# Altium PCB EzRing.PcbDoc
Units mm, origin at the board's own origin, x right, y up, seen from the top; angles counter-clockwise.
Board outline 50.25 x 50.25 mm, 2 copper layers (Top Layer, Bottom Layer); 36 components, 31 nets, 150 pads, 0 vias.
Unrouted connection lines stored in the file: 66.
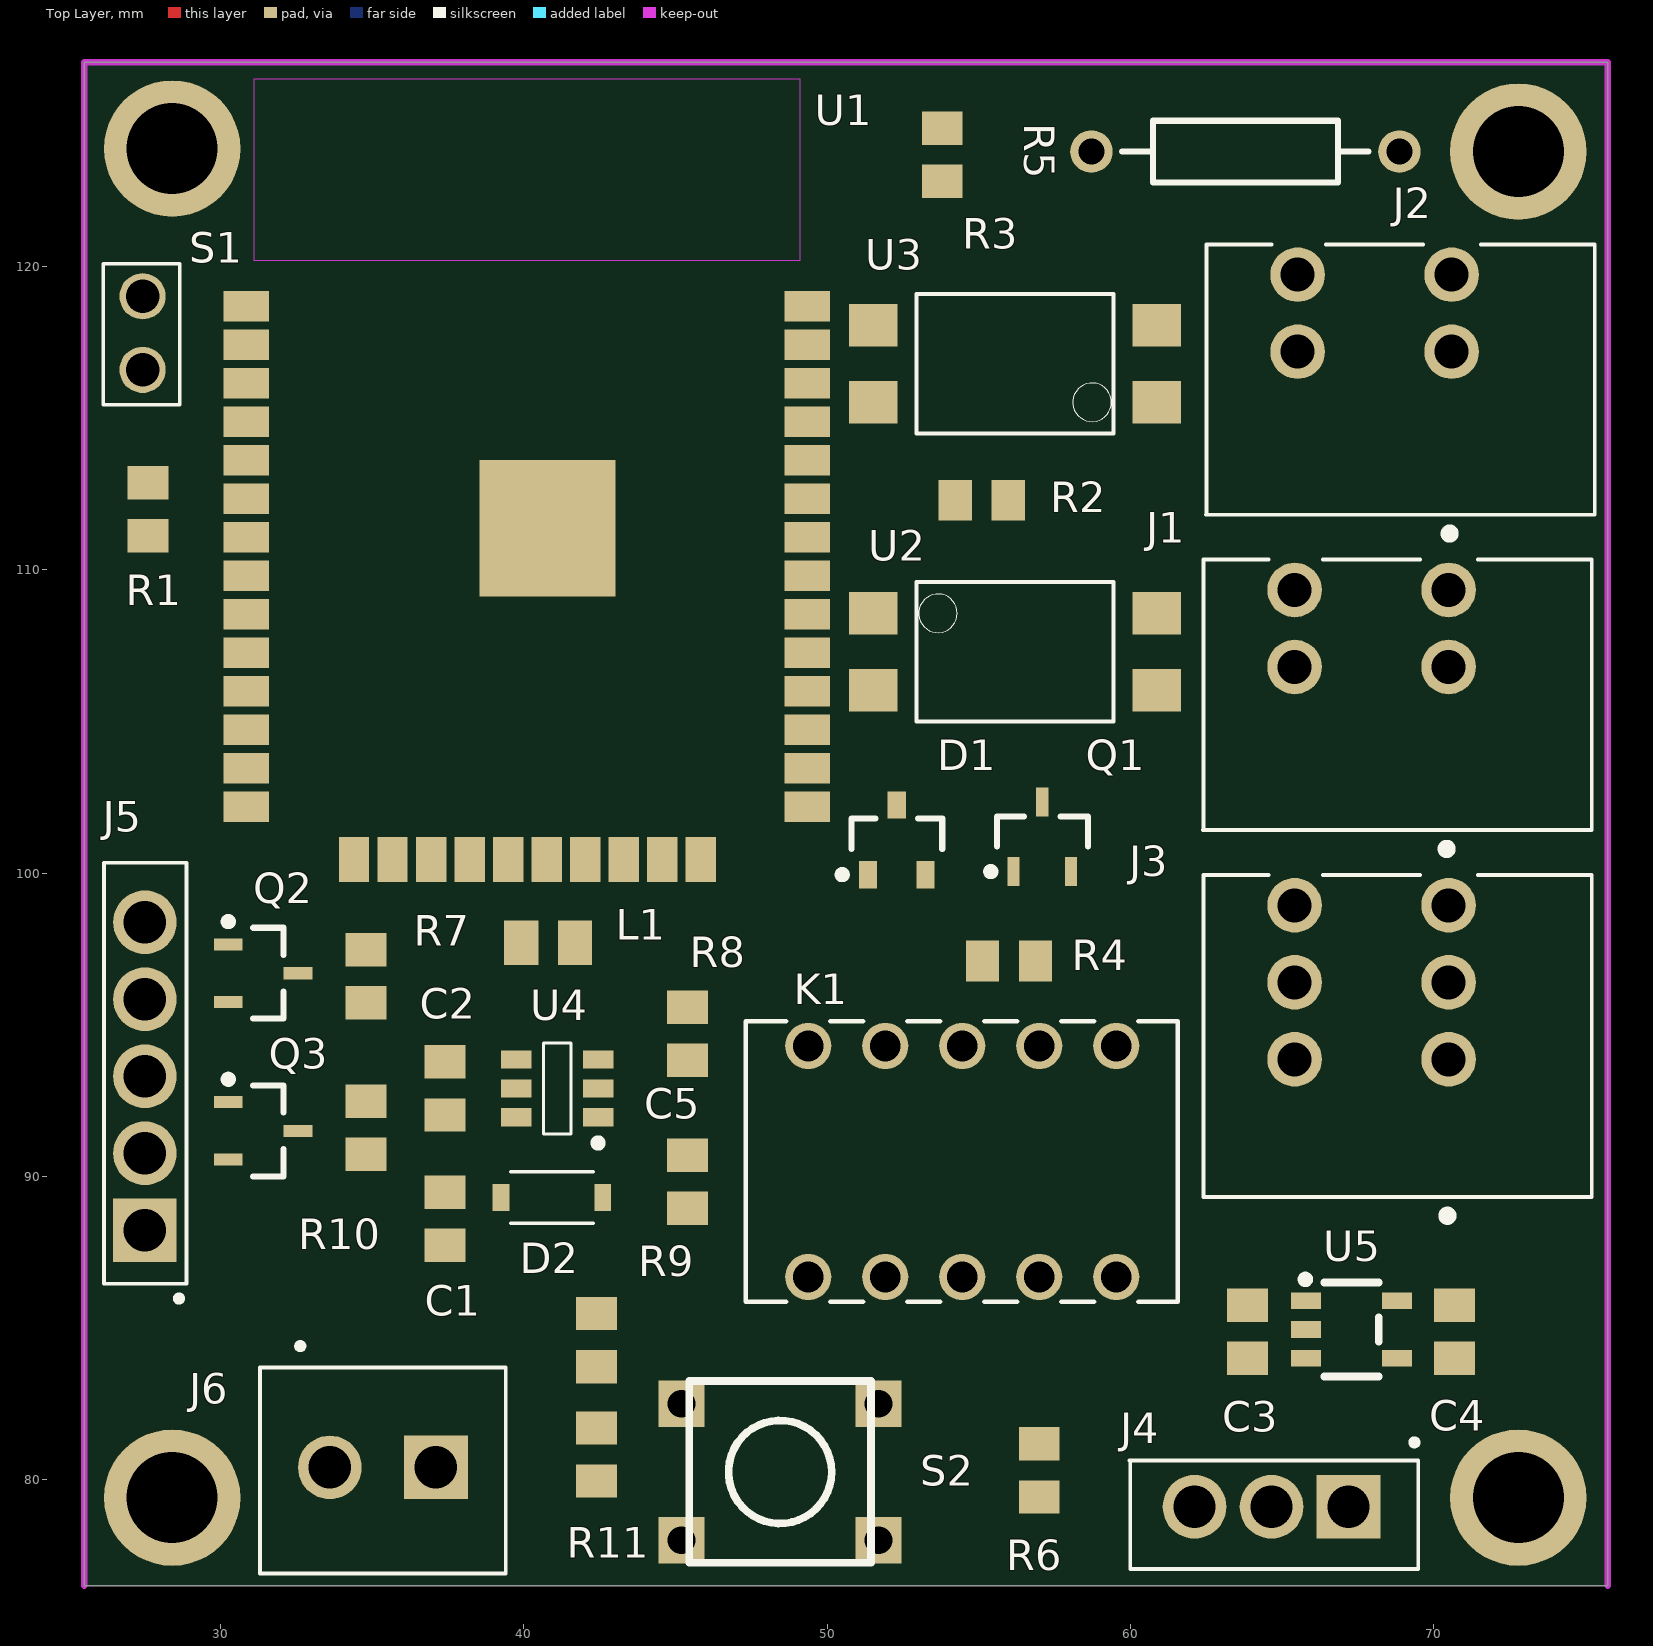
[diagram p0: Top Layer view]
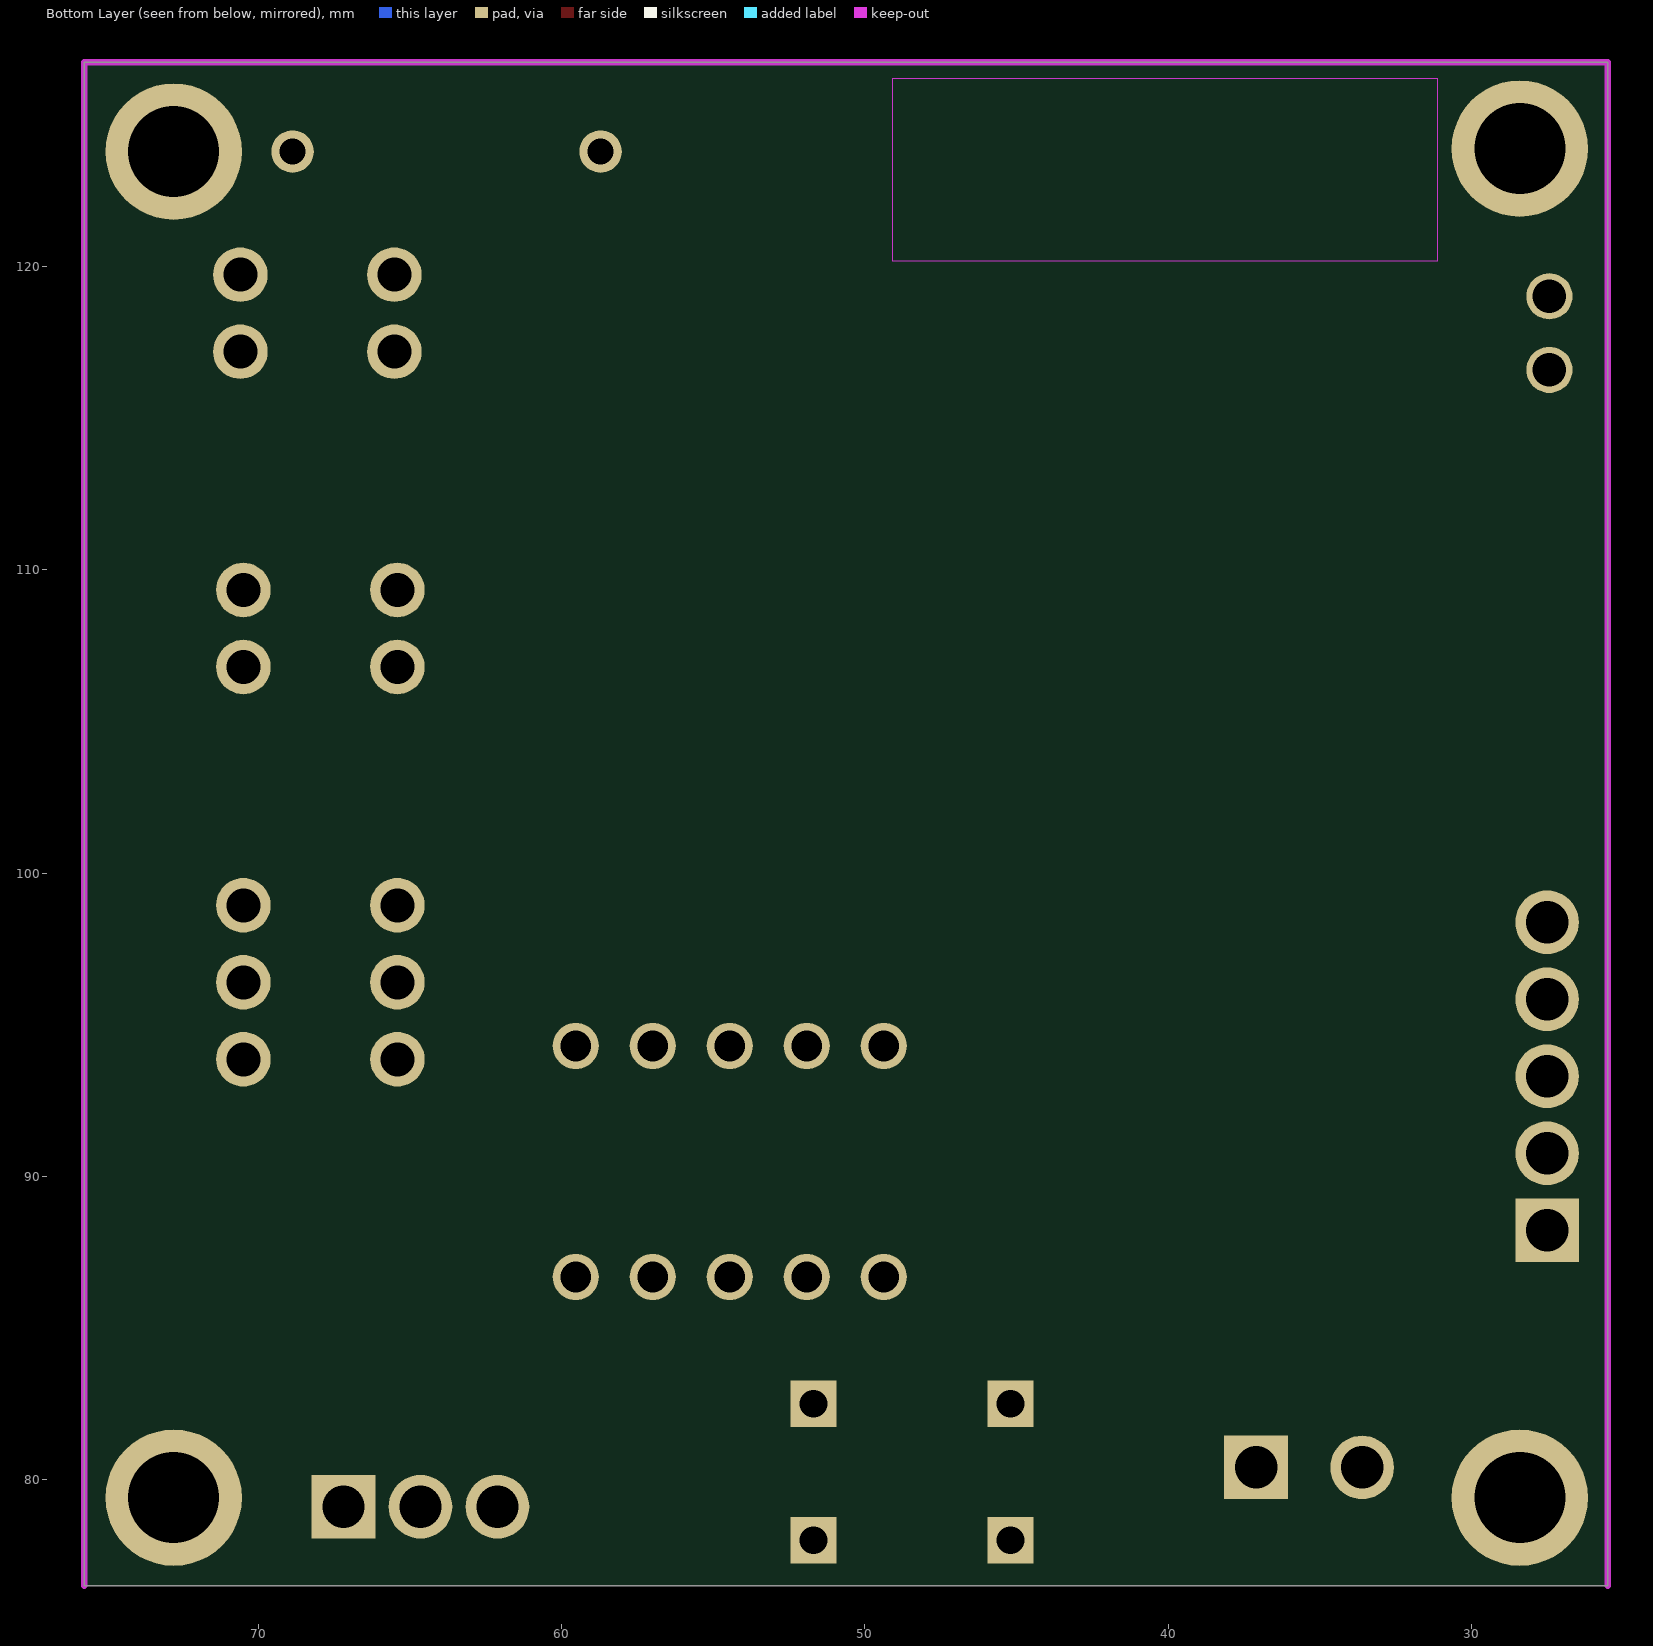
[diagram p1: Bottom Layer view, seen from below]

## Layer stack, top to bottom
Top Solder: solder mask 0.0102, Solder Resist, Dk 3.5
Top Layer: signal copper 0.0356
Dielectric 1: dielectric 0.32, FR-4, Dk 4.8
Bottom Layer: signal copper 0.0356
Bottom Solder: solder mask 0.0102, Solder Resist, Dk 3.5

## Board outline
25.5,76.496 75.75,76.496 75.75,126.746 75.438,126.746 25.5,126.746
cut-out: 25.8,126.7
cut-out: 129.794,126.746

## Design rules (kind name [scope] priority, off if disabled: settings)
Clearance [All] p1: gap=0.254 ignorepadtopadclearanceinfootprint=FALSE except(0: Arc-Hole Track-Hole SMDPad-Hole THPad-Hole Via-Hole Fill-Hole Poly-Hole Region-Hole Text-Hole)
PolygonConnect [All] p1: connectstyle=Relief reliefconductorwidth=0.254 reliefentries=4 polygonreliefangle="90 Angle" airgapwidth=0.254
RoutingVias [All] p1: holewidth=0.711 width=1.27 viastyle="Through Hole" minholewidth=0.711 minwidth=1.27 maxholewidth=0.711 maxwidth=1.27
SolderMaskExpansion [All] p1: expansion=0.102 istentingtop=FALSE
Width [All] p1: maxlimit=0.254 minlimit=0.254 preferedwidth=0.254
30 further rules are at their usual default settings.

## Components (designator, comment, footprint, x,y, rotation, side; value= is the part's Value field where it differs from the comment)
C1 "10nF" 0805 37.4,88.6 r90 top
C2 "10uF" 0805 37.4,92.9 r270 top
C3 "0.1uF" 0805 63.872,84.872 r90 top
C4 "0.1uF" 0805 70.7,84.872 r90 top
C5 "22uF" 0805 45.4,89.825 r90 top
D1 "BAT54C" "BAT54 series" 52.3,101.1 r90 top
D2 "SS1030_R1_00001" "SOD123 DIODE" 40.9,89.4 r0 top
J1 "DG141V-2.54-02P" "term blk 2p 2.54 2 leg 5.08 between legs" 65.42,104.26 r90 top
J2 "DG141V-2.54-02P" "term blk 2p 2.54 2 leg 5.08 between legs" 65.52,114.66 r90 top
J3 "DG250-3.5-03P" "term blk 2.54 3p 2 leg 5.08  between leg" 65.42,93.86 r90 top
J4 "2.54 mm" HEADER-2.54-03 67.2,79.1 r180 top
J5 "2.54 mm" HEADER-2.54-5P 27.5,88.22 r90 top
J6 "DG350-3.5-02P" Header-3.5-02 37.1,80.4 r180 top
K1 "TQ2-5V" RELAY_TQ2_2C_PAN 49.38,86.68 r90 top
L1 "4.7uH" INDC2012X10N 40.8,97.7 r0 top
Q1 "BC818" BC818 57.1,101.2 r90 top
Q2 "BC818" BC818 31.4,96.7 r0 top
Q3 "BC818" BC818 31.4,91.5 r0 top
R1 "12K" 0805 27.6,112 r270 top
R2 "680" 0805 55.1,112.3 r0 top
R3 "12K" 0805 53.8,123.7 r270 top
R4 "12K" 0805 56,97.1 r180 top
R5 "680" AXIAL-0.4 63.8,123.8 r180 top
R6 "12K" 0805 57,80.3 r90 top
R7 "12K" 0805 34.8,96.6 r270 top
R8 "100K" 0805 45.4,94.7 r270 top
R9 "12K" 0805 42.4,84.6 r270 top
R10 "12K" 0805 34.8,91.6 r90 top
R11 "2.87K" 0805 42.4,80.825 r90 top
S1 "Reset" "Kısa Devre anahtarlaması" 27.425,119.025 r0 top
S2 "Button" "Push Button" 51.7,78 r90 top
U1 "ESP32-S" ESP-32S 40.1,111.7 r0 top
U2 "LTV-816S-TP-C" "OPTO LTV-816S" 56.2,107.3 r270 top
U3 "LTV-816S-TP-C" "OPTO LTV-816S" 56.2,116.8 r90 top
U4 "MP2359" "MP2359 vol reg TSOT23-6" 41.1,92.9 r180 top
U5 "LR9102G-3V3" LR9102G-3V3-AE5-R -93.855,-220.471 r270 top

## Footprints (in the part's own frame and the unit in brackets; to place one, negate y for a bottom-side part, rotate by r counter-clockwise, add the part's x,y. Pads: shape width x height; smd on the part's side, far side on the other; paste and mask are expansions set on the pad)
0805 [mm] "Chip Resistor, 2-Leads, Body 2,00x1,23mm, IPC Medium Density"
  rect 1.1x1.35 smd: 1(-0.875,0) 2(0.875,0)
  body extent -1.07,-0.67 1.08,0.67, height 0.65
AXIAL-0.4 [mm] "Axial Device, Thru-Hole; 2 Leads; 0.4 in Pin Spacing"
  round 1.4 hole 0.85: 1(-5.08,0) 2(5.08,0)
  silkscreen extent -4.06,-1.02 4.06,1.02
"BAT54 series" [mm] "Schottky barrier diodes SOT23, 3-Leads,"
  rect 0.9x0.6 smd: 1(-1.15,0.95) 2(-1.15,-0.95) 3(1.15,0)
  silkscreen extent -1.27,-1.5 0.7,1.92, body extent -0.7,-1.5 0.7,1.5, height 1.1
BC818 [mm] "SOT23127P600-8N"
  rect 0.95x0.4 smd: 1(-1.15,0.95) 2(-1.15,-0.95) 3(1.15,0)
  silkscreen extent -1.27,-1.5 0.67,1.82, body extent -0.67,-1.47 0.67,1.48, height 1.1
ESP-32S [mm]
  rect 1.5x1 smd: 1(-9.25,7) 2(-9.25,5.73) 3(-9.25,4.46) 4(-9.25,3.19) 5(-9.25,1.92) 6(-9.25,0.65) 7(-9.25,-0.62) 8(-9.25,-1.89) 9(-9.25,-3.16) 10(-9.25,-4.43) 11(-9.25,-5.7) 12(-9.25,-6.97) 13(-9.25,-8.24) 14(-9.25,-9.51) 25(9.25,-9.51) 26(9.25,-8.24) 27(9.25,-6.97) 28(9.25,-5.7) 29(9.25,-4.43) 30(9.25,-3.16) 31(9.25,-1.89) 32(9.25,-0.62) 33(9.25,0.65) 34(9.25,1.92) 35(9.25,3.19) 36(9.25,4.46) 37(9.25,5.73) 38(9.25,7)
  rect 1x1.5 smd: 15(-5.7,-11.25) 16(-4.43,-11.25) 17(-3.16,-11.25) 18(-1.89,-11.25) 19(-0.62,-11.25) 20(0.65,-11.25) 21(1.92,-11.25) 22(3.19,-11.25) 23(4.46,-11.25) 24(5.73,-11.25)
  rect 4.5x4.5 smd: GND(0.68,-0.33)
  Keep-Out Layer region: 9,8.5 -9,8.5 -9,14.5 9,14.5
  Keep-Out Layer region: 9,8.5 -9,8.5 -9,14.5 9,14.5
HEADER-2.54-03 [mm]
  rect 2.1x2.1 hole 1.4: 1(0,0)
  round 2.1 hole 1.4: 2(2.54,0) 3(5.08,0)
  silkscreen extent -2.3,-2.22 7.22,2.05
HEADER-2.54-5P [mm] "klemens"
  rect 2.1x2.1 hole 1.4: 1(0,0)
  round 2.1 hole 1.4: 2(2.54,0) 3(5.08,0) 4(7.62,0) 5(10.16,0)
  silkscreen extent -2.35,-1.38 12.13,1.35
Header-3.5-02 [mm] "klemens"
  rect 2.1x2.1 hole 1.4: 1(0,0)
  round 2.1 hole 1.4: 2(3.5,0)
  silkscreen extent -2.3,-4.1 5.8,3.5
INDC2012X10N [mm] "Chip Inductor, 2-Leads, Body 2,00x1,25mm, IPC Medium Density"
  rect 1.13x1.47 smd: 1(-0.885,0) 2(0.885,0)
  body extent -1.1,-0.72 1.1,0.72, height 1
"Kısa Devre anahtarlaması" [mil]
  round 60 hole 43.31: 1(0,0) 2(0,-95.47)
  silkscreen extent -51,-141 48,42
LR9102G-3V3-AE5-R [mm] "LR9102G-3V3-AE5-R - IC-LR9102 V.REG 3V3 SOT-23-5 TR UTC"
  rect 0.55x1 smd: 1(-306.371,159.655) 2(-305.421,159.655) 3(-304.471,159.655) 4(-304.471,162.655) 5(-306.371,162.655)
  silkscreen extent -307.2,159.5 -303.87,162.05
"MP2359 vol reg TSOT23-6" [mm] "SOT23, 6-Leads, Body 2,90x2,80mm, Pitch 0,95mm, IPC Medium Density"
  rect 1x0.6 smd: 1(-1.35,0.95) 2(-1.35,0) 3(-1.35,-0.95) 4(1.35,-0.95) 5(1.35,0) 6(1.35,0.95)
  silkscreen extent -1.48,-1.5 0.45,1.92, body extent -0.85,-1.5 0.85,1.5, height 1
"OPTO LTV-816S" [mm] "LTV-816S-TP-C - IC-816 OPTO SMD"
  rect 1.4x1.6 smd: 1(-1.27,-4.68) 2(1.27,-4.68) 3(1.27,4.68) 4(-1.27,4.68)
  silkscreen extent -2.3,-3.25 2.3,3.25
"Push Button" [mil] "KLS7-TS6601"
  rect 60x60 hole 36: 1(0,0) 2(0,255.91) 3(177.17,0) 4(177.17,255.91)
  silkscreen extent -30,10 207,246
RELAY_TQ2_2C_PAN [mil]
  round 60 hole 40 mask+0: 1(300,0) 2(300,-100) 3(300,-200) 4(300,-300) 5(300,-400) 6(0,-400) 7(0,-300) 8(0,-200) 9(0,-100) 10(0,0)
  silkscreen extent -32,-480 332,81, body extent 0,0 10,10, height 10
"SOD123 DIODE" [mm]
  rect 0.55x0.9 smd: 1(1.705,-0.1) 2(-1.655,-0.1)
  silkscreen extent -1.33,-0.95 1.37,0.75
"term blk 2.54 3p 2 leg 5.08  between leg" [mm]
  round 1.8 hole 1.12: 1(5.08,0) 1_1(5.08,-5.08) 2(2.54,0) 3(0,0) 3_1(0,-5.08)
  round 1.8 hole 1.12 paste+0: 2_1(2.54,-5.08)
  silkscreen extent -5.26,-9.8 6.08,3
"term blk 2p 2.54 2 leg 5.08 between legs" [mm]
  round 1.8 hole 1.12: 1(5.08,0) 1_1(5.08,-5.08) 2(2.54,0)
  round 1.8 hole 1.12 paste+0: 2_1(2.54,-5.08)
  silkscreen extent -3.56,-9.8 6.08,3.02

## Part data
C1: library part Cap, "MLCC (2012) 0805 10nF 100VDC ±10% X7R", ComponentLink1Description=Ozdisan, ComponentLink1URL=https://ozdisan.com/pasif-komponentler/kondansatorler/smt-smd-ve-mlcc-kondansatorler/CL21B103KCANNNC, LatestRevisionDate=17-Jul-2002, LatestRevisionNote="Re-released for DXP Platform.", Ozdisan Part#=CL21B103KCANNNC, PackageDescription="Radial Cap, Thru-Hole; 2 Leads; 0.3 in Pin Spacing", PackageReference=RAD-0.3, Published=8-Jun-2000, Publisher="Altium Limited"
C2: library part Cap, "MLCC (2012) 0805 10uF 25VDC ±10% X5R", ComponentLink1Description=Ozdisan, ComponentLink1URL=https://ozdisan.com/pasif-komponentler/kondansatorler/smt-smd-ve-mlcc-kondansatorler/CL21A106KAYNNNE, LatestRevisionDate=17-Jul-2002, LatestRevisionNote="Re-released for DXP Platform.", Ozdisan Part#=CL21A106KAYNNNE, PackageDescription="Radial Cap, Thru-Hole; 2 Leads; 0.3 in Pin Spacing", PackageReference=RAD-0.3, Published=8-Jun-2000, Publisher="Altium Limited"
C3 C4: library part Cap, "Capacitor", ComponentLink1Description=Ozdisan, ComponentLink1URL=https://ozdisan.com/pasif-komponentler/kondansatorler/smt-smd-ve-mlcc-kondansatorler/CL21A226MAQNNNE, LatestRevisionDate=17-Jul-2002, LatestRevisionNote="Re-released for DXP Platform.", Ozdisan Part#=CL21A226MAQNNNE, PackageDescription="Radial Cap, Thru-Hole; 2 Leads; 0.3 in Pin Spacing", PackageReference=RAD-0.3, Published=8-Jun-2000, Publisher="Altium Limited"
C5: library part Cap, "MLCC (2012) 0805 22uF 6.3VDC ±20% X5R", ComponentLink1Description=Ozdisan, ComponentLink1URL=https://ozdisan.com/pasif-komponentler/kondansatorler/smt-smd-ve-mlcc-kondansatorler/CL21A226MQQNNNE, LatestRevisionDate=17-Jul-2002, LatestRevisionNote="Re-released for DXP Platform.", Ozdisan Part#=CL21A226MQQNNNE, PackageDescription="Radial Cap, Thru-Hole; 2 Leads; 0.3 in Pin Spacing", PackageReference=RAD-0.3, Published=8-Jun-2000, Publisher="Altium Limited"
D1: library part Diode, "DIODE SCHOTTKY 2*0.2A 30V SOT23 CATHODE PHILIPS", Code_JEDEC=DO-214-AB, ComponentLink1Description=Ozdisan, ComponentLink1URL=https://www.ozdisan.com/guc-yari-iletkenleri/diyotlar-modul-diyotlar-ve-dogrultucular/schottky-diyotlar/BAT54C215, LatestRevisionDate=17-Jul-2002, LatestRevisionNote="Re-released for DXP Platform.", Ozdisan Part#=BAT54C,215, PackageDescription="DO-214-AB/SMC; 2 C-Bend Leads; Body 7.9 x 5.9 mm, inc. leads (LxW)", PackageReference=SMC, PackageVersion=Sep-1996, Published=8-Jun-2000, Publisher="Altium Limited"
D2: library part Diode, "DIODE SCHOTTKY 1A 30V SOD123 SMT", Code_JEDEC=DO-214-AB, ComponentLink1Description=Ozdisan, ComponentLink1URL=https://ozdisan.com/Product/Detail/629142/MBRS130LT3G, LatestRevisionDate=17-Jul-2002, LatestRevisionNote="Re-released for DXP Platform.", Ozdisan Part#=MBRS130LT3G, PackageDescription="DO-214-AB/SMC; 2 C-Bend Leads; Body 7.9 x 5.9 mm, inc. leads (LxW)", PackageReference=SMC, PackageVersion=Sep-1996, Published=8-Jun-2000, Publisher="Altium Limited"
J1 J2: library part 282843-2, Package=None, Availability=Unavailable, ComponentLink1Description=Ozdisan, MF="{'manufacturer': 'TE Connectivity'}", MP=282843-2, Ozdisan Part#=DG141V-2.54-02P-14-00AH, Price=None
  J2: ComponentLink1URL=https://ozdisan.com/konnektor-ve-baglanti-elemanlari/klemensler/pcb-klemensler/DG141V-2-54-02P-14-00AH
J3: library part 282843-3, "TERM.BLK.3.50MM 3P PCB TYPE GRAY GAOSONG", Package=None, ComponentLink1Description=Ozdisan, ComponentLink1URL=https://ozdisan.com/konnektor-ve-baglanti-elemanlari/klemensler/pcb-klemensler/DG141V-2-54-03P-14-00AH, Digi-Key_Part_Number=A98085-ND, DigiKey-Purchase-URL=https://snapeda.com/shop?store=DigiKey&id=2375700, EU_RoHS_Compliance="Compliant with Exemptions", MF="TE Connectivity", Ozdisan Part#=DG141V-2.54-03P-14-00AH, SnapEDA_Link=https://www.snapeda.com/parts/282843-3/TE%20Connectivity%20AMP%20Connectors/view-part/2375700/?ref=snap
J4: library part 282843-3, "TERMI-BLOCK PCB HEADER 2.54", Package=None, ComponentLink1Description=Ozdisan, Digi-Key_Part_Number=A98085-ND, DigiKey-Purchase-URL=https://snapeda.com/shop?store=DigiKey&id=2375700, EU_RoHS_Compliance="Compliant with Exemptions", MF="TE Connectivity", SnapEDA_Link=https://www.snapeda.com/parts/282843-3/TE%20Connectivity%20AMP%20Connectors/view-part/2375700/?ref=snap
J5: library part "Header 5", "Header, 5-Pin boşta kalacak.", LatestRevisionDate=17-Jul-2002, LatestRevisionNote="Re-released for DXP Platform.", Pitch=3.5, Publisher="Altium Limited"
J6: library part 282843-2, "TERM.BLK.3.81MM 2P PCB TYPE GREEN GAOSONG", Package=None, Availability=Unavailable, ComponentLink1Description=Ozdisan, ComponentLink1URL=https://ozdisan.com/konnektor-ve-baglanti-elemanlari/klemensler/pcb-klemensler/DG350-3-5-02P-14-02AH, MF="{'manufacturer': 'TE Connectivity'}", MP=282843-2, Ozdisan Part#=DG350-3.5-02P-14-02AH, Price=None
K1: library part EE2-3TNUH-L, "RELAY 1A 5VDC TELECOM TYPE PANASONIC", Package=None, Arrow_Electronics-Purchase-URL=https://snapeda.com/shop?store=Arrow+Electronics&id=696044, Availability=Good, ComponentLink1Description=Ozdisan, ComponentLink1URL=https://ozdisan.com/Product/Detail/8572/TQ2-5V, DigiKey-Purchase-URL=https://snapeda.com/shop?store=DigiKey&id=696044, MF=KEMET, Mouser-Purchase-URL=https://snapeda.com/shop?store=Mouser&id=696044, MP=EE2-3TNUH-L, Ozdisan Part#=TQ2-5V, Price=None, SnapEDA_Link=https://www.snapeda.com/parts/EE2-3TNUH-L/KEMET/view-part/696044/?ref=snap
L1: library part Inductor, "INDUCTOR FIXED 0805 4.7UH SMD", Code_JEITA=0402, Code_IEC=1005, ComponentLink1Description=Ozdisan, ComponentLink1URL=https://ozdisan.com/pasif-komponentler/induktorler/sabit-induktorler/CL2012C-4R7M-N, LatestRevisionDate=29-May-2009, LatestRevisionNote="IPC-7351 Footprint Added.", Ozdisan Part#=CL2012C-4R7M-N, PackageDescription="Chip Inductor", PackageReference=0402-A, Published=8-Jun-2000, Publisher="Altium Limited"
Q1 Q2 Q3: library part NPN, "BC818-16W,115 - TRANSISTOR DIS.500mA 25V NPN SOT323 GEN. SMT", ComponentLink1Description=Ozdisan, ComponentLink1URL=https://www.ozdisan.com/guc-yari-iletkenleri/transistorler/discrete-transistorler/BC818-16W115, LatestRevisionDate=17-Jul-2002, LatestRevisionNote="Re-released for DXP Platform.", Ozdisan Part#=BC818-16W,115, PackageDescription="TO, Flat Index; 3 In-Line, Axial Leads; Body Dia. 4.8mm; Leads 0.55 x 0.51 mm (max)", PackageReference=TO-226-AA, Published=8-Jun-2000, Publisher="Altium Limited"
R1 R2 R3 R4 R6 R7 R8 R9 R10 R11: library part Res2, "Resistor", LatestRevisionDate=17-Jul-2002, LatestRevisionNote="Re-released for DXP Platform.", PackageDescription="Axial Device, Thru-Hole; 2 Leads; 0.4 in Pin Spacing", PackageReference=AXIAL-0.4, Published=8-Jun-2000, Publisher="Altium Limited"
  R1 R3 R7 R9 R10: ComponentLink1Description=Ozdisan, ComponentLink1URL=https://ozdisan.com/pasif-komponentler/direncler/smt-smd-ve-cip-direncler/0805S8J0123T5E, Ozdisan Part#=0805S8J0123T5E
  R2: ComponentLink1Description="New link", ComponentLink1URL=https://www.ozdisan.com/pasif-komponentler/direncler/smt-smd-ve-cip-direncler/0805S8J0681T5E, Ozdisan Part#=0805S8J0681T5E
  R4 R6: ComponentLink1Description=Ozdisan, ComponentLink1URL=https://www.ozdisan.com/pasif-komponentler/direncler/smt-smd-ve-cip-direncler/0805S8J0123T5E, Ozdisan Part#=0805S8J0123T5E
  R8: ComponentLink1Description=Ozdisan, ComponentLink1URL=https://ozdisan.com/pasif-komponentler/direncler/smt-smd-ve-cip-direncler/0805S8J0104T5E, Ozdisan Part#=0805S8J0104T5E
  R11: ComponentLink1Description=Ozdisan, ComponentLink1URL=https://www.ozdisan.com/pasif-komponentler/direncler/smt-smd-ve-cip-direncler/0805S8F2871T5E, Ozdisan Part#=0805S8F2871T5E
R5: library part Res2, "Dip Resistor", ComponentLink1Description="New link", ComponentLink1URL=https://www.ozdisan.com/pasif-komponentler/direncler/tht-dip-direncler/MF01WJJ0681A10, LatestRevisionDate=17-Jul-2002, LatestRevisionNote="Re-released for DXP Platform.", Ozdisan Part#=MF01WJJ0681A10, PackageDescription="Axial Device, Thru-Hole; 2 Leads; 0.4 in Pin Spacing", PackageReference=AXIAL-0.4, Published=8-Jun-2000, Publisher="Altium Limited"
S1: library part SW-PB, "Burayı bir cımbız ile kısa devre yapılabilecek bir yapıda bırakacağız. buton koyulmayacak.", LatestRevisionDate=17-Jul-2002, LatestRevisionNote="Re-released for DXP Platform.", PackageDescription="Switch; 2 Leads", PackageReference=SPST-2, Published=24-Mar-1999, Publisher="Altium Limited"
S2: library part SW-PB, "PUSH", ComponentLink1Description=Ozdisan, ComponentLink1URL=https://www.ozdisan.com/elektromekanik-komponentler/sivicler-ve-anahtarlar/tact-sivicler/L-KLS7-TS6604-4-3-160-T, LatestRevisionDate=17-Jul-2002, LatestRevisionNote="Re-released for DXP Platform.", Ozdisan Part#=L-KLS7-TS6604-4.3-160-T, PackageDescription="Switch; 2 Leads", PackageReference=SPST-2, Published=24-Mar-1999, Publisher="Altium Limited"
U2 U3: library part Optoisolator1, "IC-816 OPTO SMD", ComponentLink1Description=Ozdisan, ComponentLink1URL=https://www.ozdisan.com/optolar-ve-sensorler/optolar/transistor-cikisli-optokuplorler/LTV-816S-TP-C, DatasheetVersion=Nov-2003, LatestRevisionDate=04-Mar-2005, LatestRevisionNote="Sch pins 3 & 4 Swapped.", Ozdisan Part#=LTV-816S-TP-C, PackageReference=SMD, Published=24-Mar-1999, Publisher="Altium Limited"
U4: "IC-2359 V.REG BUCK ADJ 1.2A TSOT23-6", ComponentLink1Description=Ozdisan, ComponentLink1URL=https://ozdisan.com/Product/Detail/625041/MP2359DJ-LF-Z, Ozdisan Part#=MP2359DJ-LF-Z
U5: "IC-LR9102 V.REG 3V3 SOT-23-5 TR UTC (0-6,6V to 3,3V)", ComponentLink1Description=Ozdisan, ComponentLink1URL=https://www.ozdisan.com/entegre-devreler-ics/guc-entegreleri/lineer-voltaj-regulatorleri/LR9102G-3V3-AE5-R, Ozdisan Part#=LR9102G-3V3-AE5-R
U1: ComponentLink1Description=ozdisan, ComponentLink1URL=https://ozdisan.com/Product/Detail/632855/ESP32-S-32MBIT, Ozdisan Part#="ESP32-S (32MBIT)"

## Free pads (board coordinates)
  round 4.5 hole 3: ""(28.4,79.4) ""(28.4,123.9) ""(72.8,79.4) ""(72.8,123.8)

## Nets (pads, with @x,y where several pads share a name; then routed paths per layer and width w, separated by ;. In a path a pad name is that pad's centre, name@x,y a point inside that pad or via, vN(x,y) a via of type N, cw(c..) or ccw(c..) an arc to the next point about the centre after c; other vN are vias at no path point)
3.3V: C4.2 R1.1 R3.1 R6.2 U1.2 U5.5
4.2V: C3.2 C5.2 D1.2 K1.1 L1.2 R9.2 U5.1 U5.3
GND: C2.1 C3.1 C4.1 C5.1 D2.1 J5.5 J6.1 Q1.3 R11.1 S1.1 S2.2 U1.1 U1.15 U1.38 U2.2 U3.3 U4.2 U5.2
GND-I: J2.1 U3.2
GND-O: J1.2 U2.3
NetC1_1: C1.1 D2.2 L1.1 U4.6
NetC1_2: C1.2 U4.1
NetC2_2: C2.2 J6.2 R8.2 U4.5
NetD1_1: D1.1 K1.10 Q1.1
NetJ1_1: J1.1 U2.4
NetJ2_2: J2.2 R5.1
NetJ3_1: J3.1 K1.2
NetJ3_2: J3.2 K1.3
NetJ3_3: J3.3 K1.4
NetJ4_1: J4.1 K1.7
NetJ4_2: J4.2 K1.8
NetJ4_3: J4.3 K1.9
NetQ1_2: Q1.2 R4.1
NetQ2_2: Q2.2 R7.1
NetQ2_3: Q2.3 R10.2
NetQ3_2: Q3.2 R10.1
NetQ3_3: Q3.3 R7.2
NetR1_2: R1.2 S1.2 U1.3
NetR2_1: R2.1 U1.37
NetR2_2: R2.2 U2.1
NetR3_2: R3.2 U1.13 U3.4
NetR4_2: R4.2 U1.28
NetR5_2: R5.2 U3.1
NetR6_1: R6.1 S2.1 U1.26
NetR8_1: R8.1 U4.4
NetR9_1: R9.1 R11.2 U4.3
pads on no net: D1.3 J1.1_1 J1.2_1 J2.1_1 J2.2_1 J3.1_1 J3.2_1 J3.3_1 J5.1 J5.2 J5.3 J5.4 K1.5 K1.6 Q2.1 Q3.1 S2.3 S2.4 U1.4 U1.5 U1.6 U1.7 U1.8 U1.9 U1.10 U1.11 U1.12 U1.14 U1.16 U1.17 U1.18 U1.19 U1.20 U1.21 U1.22 U1.23 U1.24 U1.25 U1.27 U1.29 U1.30 U1.31 U1.32 U1.33 U1.34 U1.35 U1.36 U1.GND U5.4

## Keep-outs
Keep-Out Layer:
  lines w0.2: 25.5,76.496 25.5,126.746 75.438,126.746 75.75,126.746 75.75,76.496

## Silkscreen, mask and mechanical layers (free items; w line width, h text height)
Top Overlay:
  region: 25.8,126.7
  region: 46,106.3

## Text inside footprints (layer, text, board x,y; h text height)
K1: Mechanical 13 "*" at 48.957,86.362 h1.27 r90